# Altium PCB ech.PcbDoc
Units mm, origin at the board's own origin, x right, y up, seen from the top; angles counter-clockwise.
Board outline 49.28 x 80.26 mm, 2 copper layers (Top Layer, Bottom Layer); 61 components, 46 nets, 155 pads, 8 vias.
Unrouted connection lines stored in the file: 1.
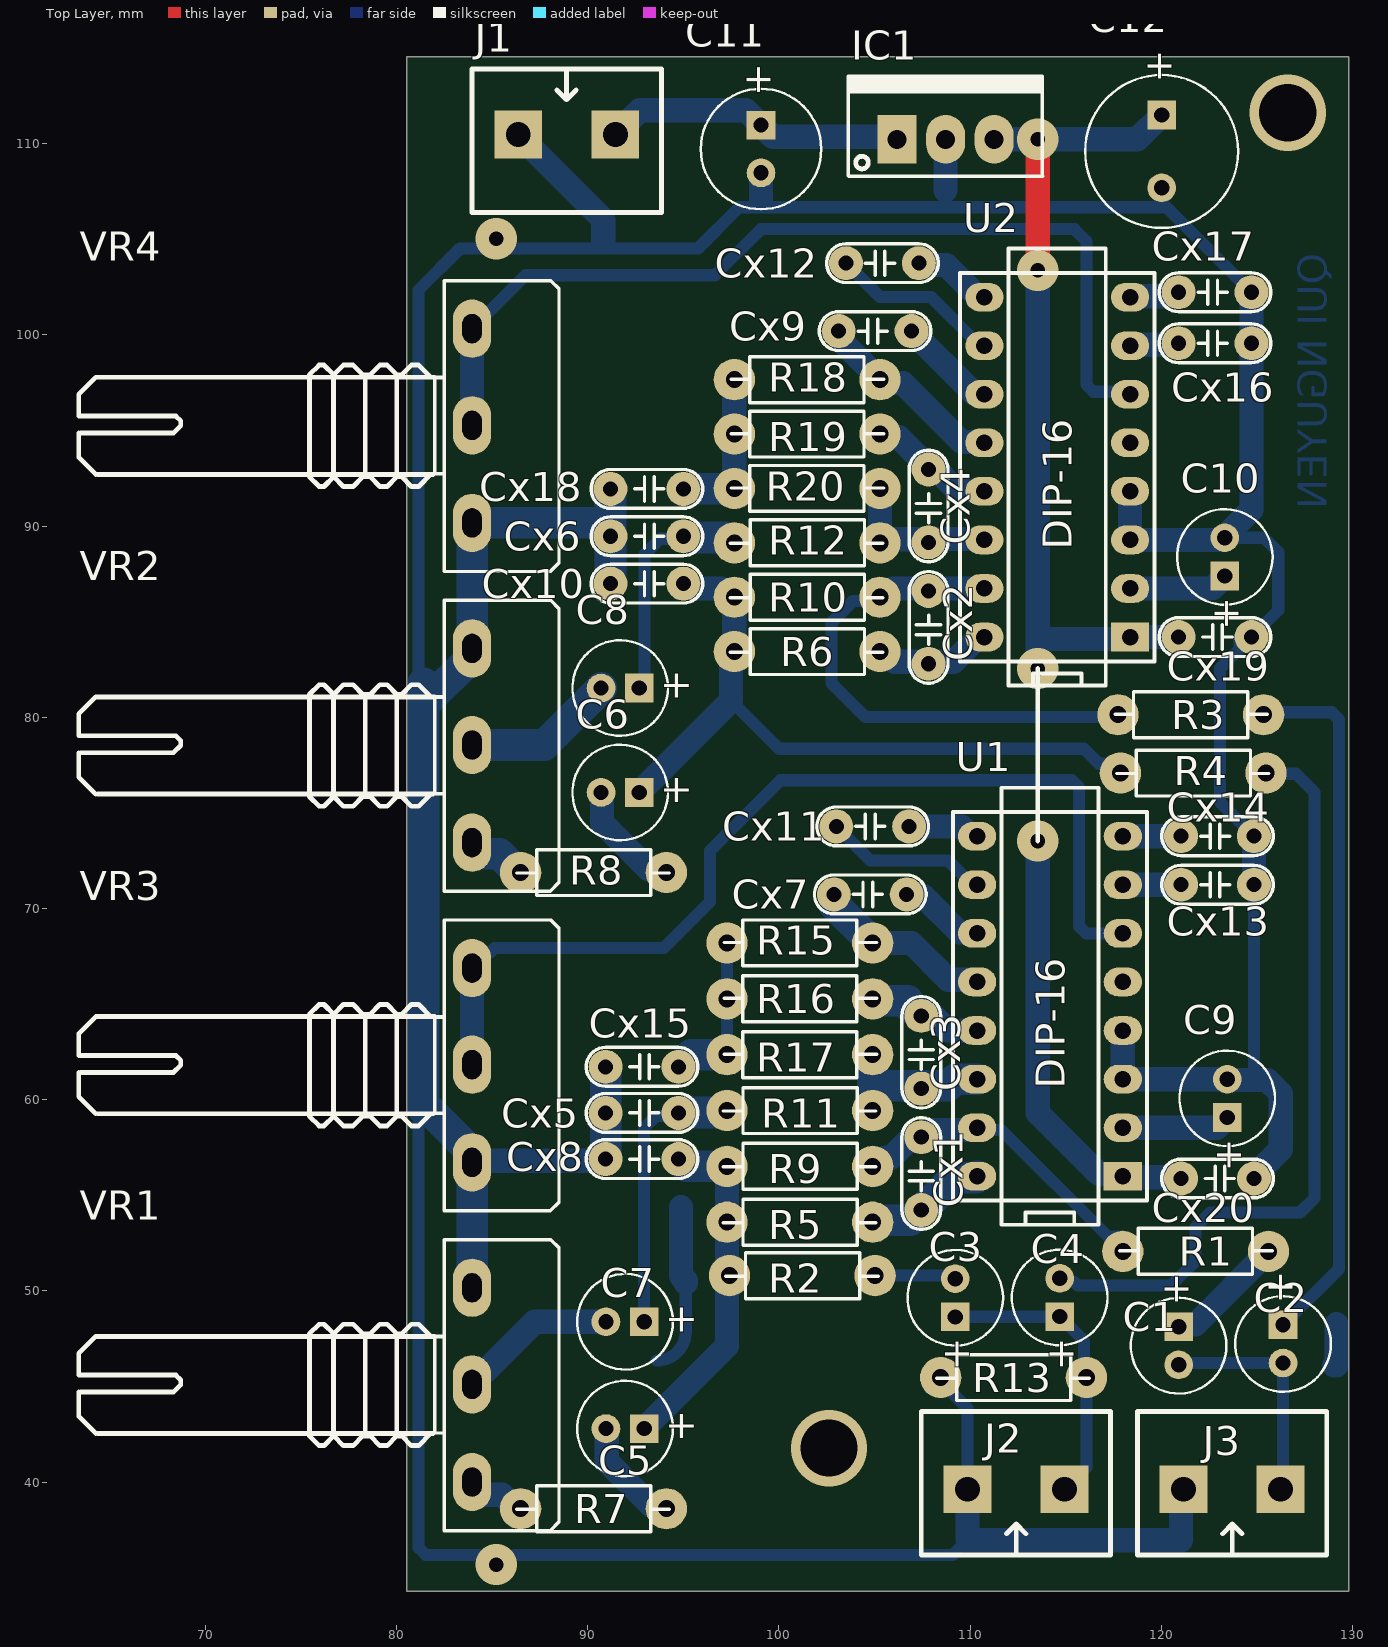
[diagram p0: Top Layer view]
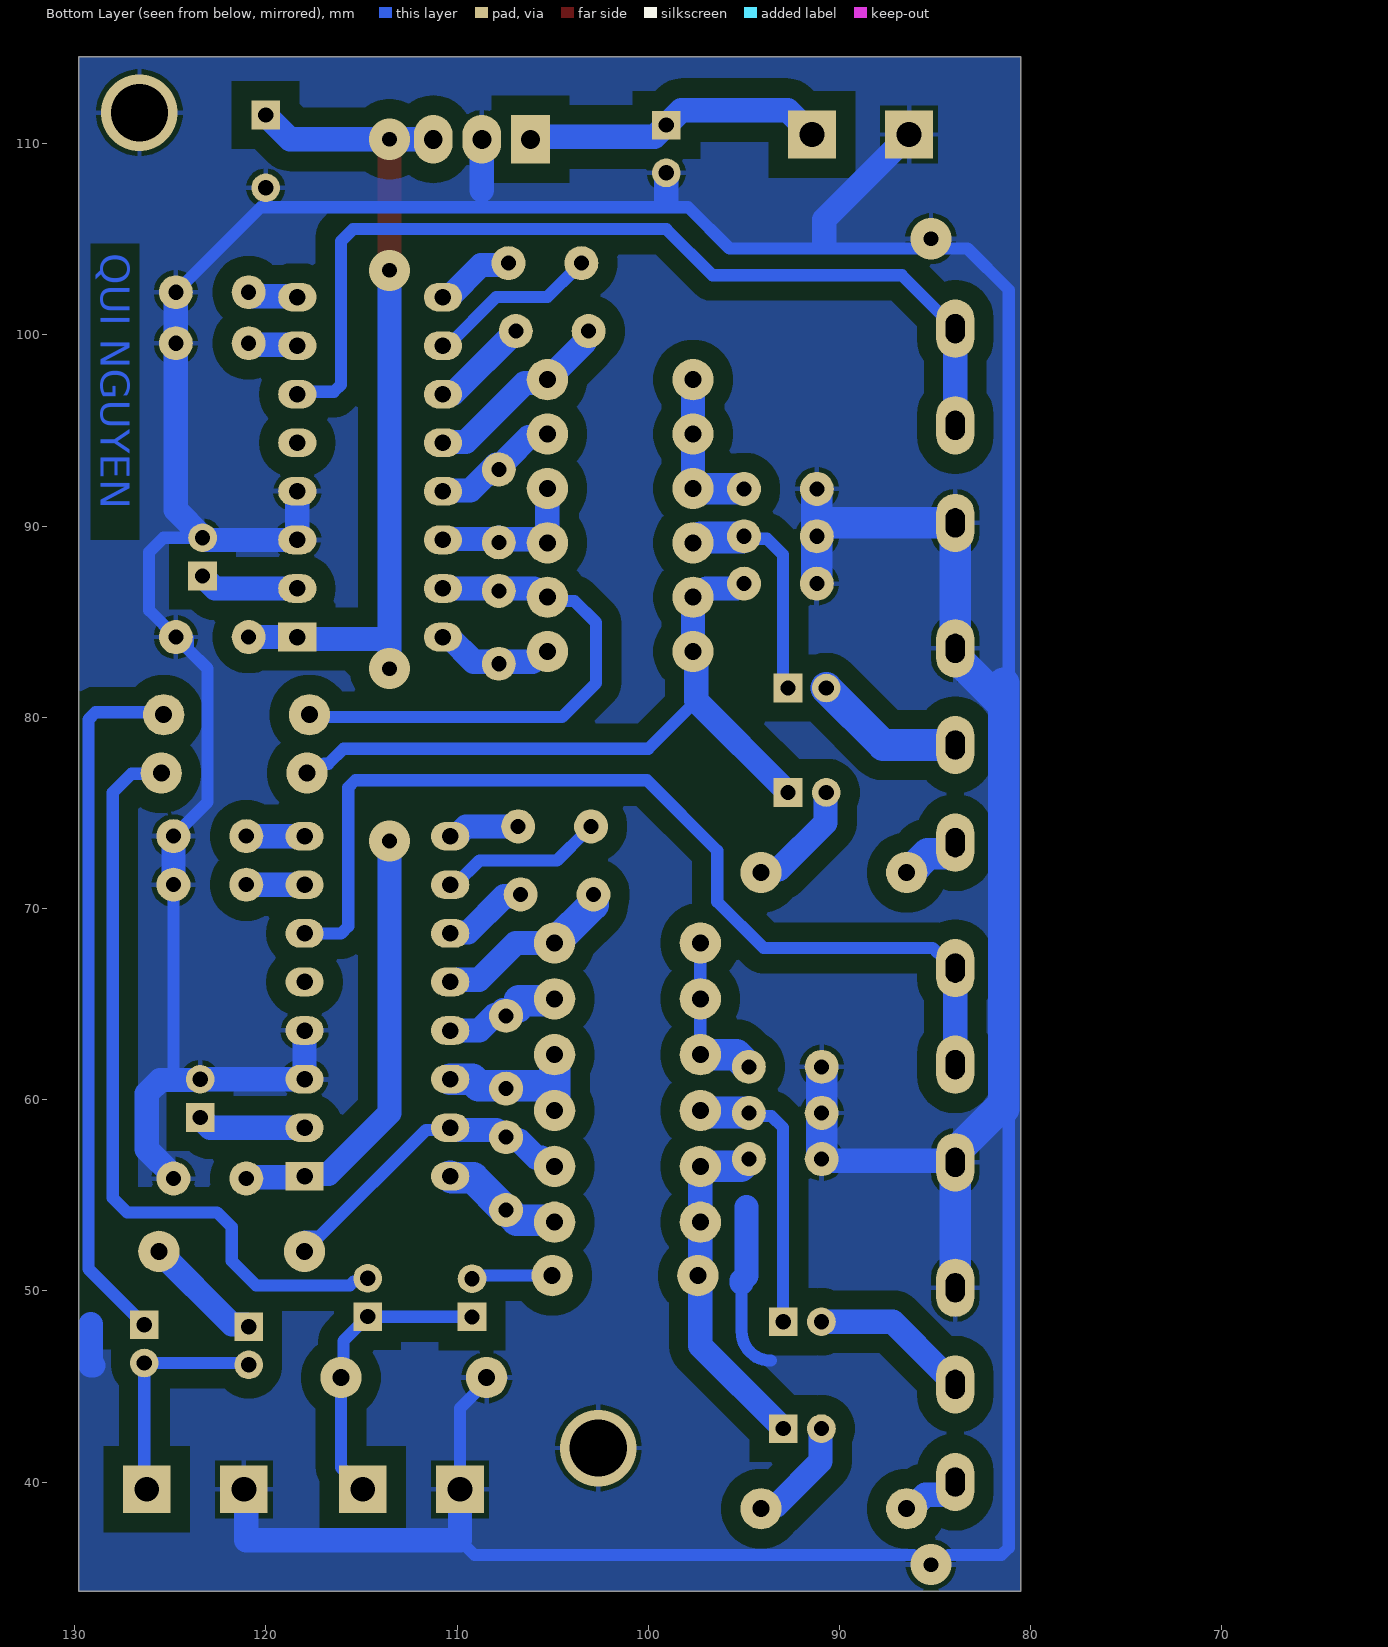
[diagram p1: Bottom Layer view, seen from below]
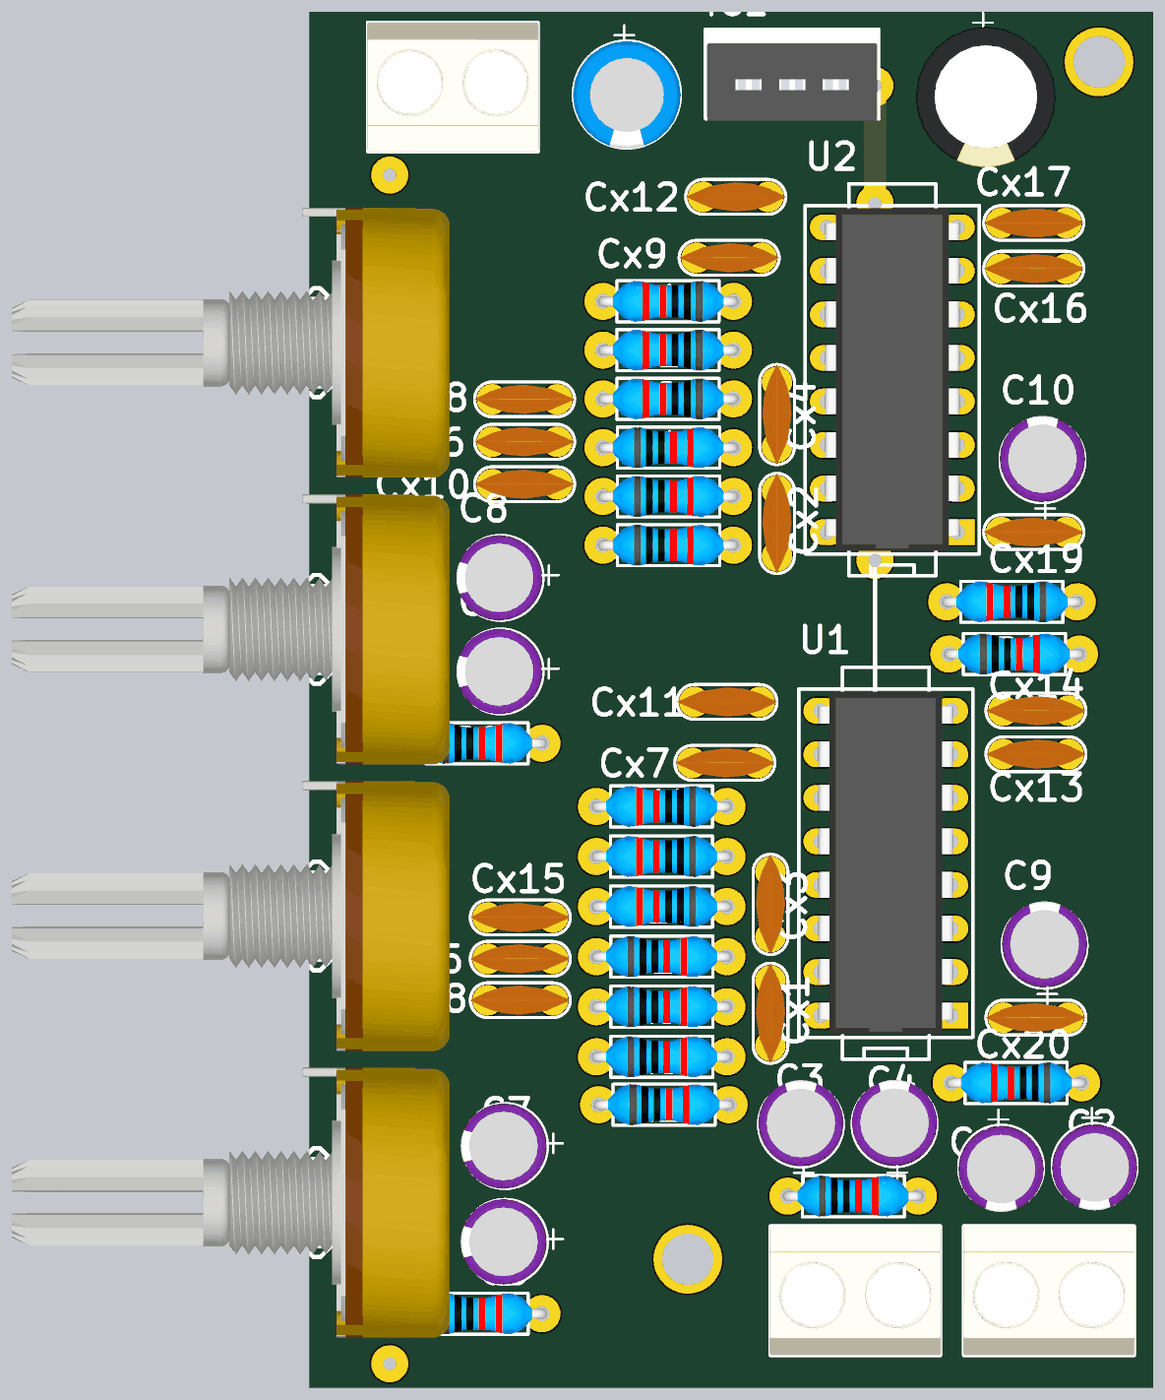
[diagram p2: 3D render of the assembled board from above, using the file's embedded part models]

## Layer stack, top to bottom
Top Solder: solder mask 0.0102, Solder Resist, Dk 3.5
Top Layer: signal copper 0.0356
Dielectric 1: dielectric 0.32, FR-4, Dk 4.8
Bottom Layer: signal copper 0.0356
Bottom Solder: solder mask 0.0102, Solder Resist, Dk 3.5

## Board outline
80.518,34.29 80.518,114.554 129.794,114.554 129.794,34.29

## Design rules (kind name [scope] priority, off if disabled: settings)
Clearance [All] p1: gap=0.254 ignorepadtopadclearanceinfootprint=FALSE except(0: Arc-Hole Track-Hole SMDPad-Hole THPad-Hole Via-Hole Fill-Hole Poly-Hole Region-Hole Text-Hole; 1.016: Arc-Fill Arc-Poly Arc-Region Track-Fill Track-Poly Track-Region SMDPad-Fill SMDPad-Poly SMDPad-Region THPad-Fill THPad-Poly THPad-Region Via-Fill Via-Poly Via-Region Fill-Fill Fill-Poly Fill-Region Poly-Poly Poly-Region Region-Region)
PolygonConnect [All] p1: connectstyle=Relief reliefconductorwidth=0.254 reliefentries=4 polygonreliefangle="90 Angle" airgapwidth=0.254
RoutingVias [All] p1: holewidth=0.711 width=1.27 viastyle="Through Hole" minholewidth=0.711 minwidth=1.27 maxholewidth=0.711 maxwidth=1.27
SolderMaskExpansion [All] p1: expansion=0.102 istentingtop=FALSE
Width [All] p1: maxlimit=1.651 minlimit=0.635 preferedwidth=1.27
30 further rules are at their usual default settings.

## Components (designator, comment, footprint, x,y, rotation, side; value= is the part's Value field where it differs from the comment)
C1 "CN-ALU-DIP" CA-ALU-5 120.904,47.133 r270 top value=104
C2 "CN-ALU-DIP" CA-ALU-5 126.365,47.228 r270 top value=104
C3 "CN-ALU-DIP" CA-ALU-5 109.22,49.641 r90 top value=104
C4 "CN-ALU-DIP" CA-ALU-5 114.681,49.657 r90 top value=104
C5 "CN-ALU-DIP" CA-ALU-5 91.948,42.799 r180 top value=104
C6 "CN-ALU-DIP" CA-ALU-5 91.694,76.073 r180 top value=104
C7 "CN-ALU-DIP" CA-ALU-5 91.948,48.387 r180 top value=104
C8 "CN-ALU-DIP" CA-ALU-5 91.694,81.534 r180 top value=104
C9 "CN-ALU-DIP" CA-ALU-5 123.444,60.071 r90 top value=104
C10 "CN-ALU-DIP" CA-ALU-5 123.317,88.392 r90 top value=104
C11 "CN-ALU-DIP" CA-ALU-6.3 99.06,109.728 r270 top value=104
C12 "CN-ALU-DIP" CA-ALU-8 120.015,109.601 r270 top value=104
Cx1 "XXpF" CN1.5 107.442,56.007 r90 top value=33pF
Cx2 "XXpF" CN1.5 107.823,84.582 r90 top value=33pF
Cx3 "XXpF" CN1.5 107.442,62.357 r90 top value=33pF
Cx4 "XXpF" CN1.5 107.823,90.932 r90 top value=33pF
Cx5 "XXpF" CN1.5 92.964,59.309 r180 top value=33pF
Cx6 "XXpF" CN1.5 93.218,89.471 r180 top value=33pF
Cx7 "XXpF" CN1.5 104.648,70.739 r0 top value=33pF
Cx8 "XXpF" CN1.5 92.964,56.896 r180 top value=33pF
Cx9 "XXpF" CN1.5 104.902,100.203 r0 top value=33pF
Cx10 "XXpF" CN1.5 93.218,86.995 r180 top value=33pF
Cx11 "XXpF" CN1.5 104.775,74.295 r0 top value=33pF
Cx12 "XXpF" CN1.5 105.283,103.759 r0 top value=33pF
Cx13 "XXpF" CN1.5 122.809,71.247 r0 top value=33pF
Cx14 "XXpF" CN1.5 122.809,73.787 r0 top value=33pF
Cx15 "XXpF" CN1.5 92.964,61.722 r180 top value=33pF
Cx16 "XXpF" CN1.5 122.682,99.568 r0 top value=33pF
Cx17 "XXpF" CN1.5 122.682,102.235 r0 top value=33pF
Cx18 "XXpF" CN1.5 93.218,91.948 r180 top value=33pF
Cx19 "XXpF" CN1.5 122.936,84.201 r180 top value=33pF
Cx20 "XXpF" CN1.5 123.063,55.88 r180 top value=33pF
IC1 "LM78xx" TO220-123 106.172,110.236 r0 top
J1 "KF2" KF2-5.08 88.9,110.49 r0 top
J2 "KF2" KF2-5.08 112.395,39.624 r180 top
J3 "KF2" KF2-5.08 123.698,39.624 r180 top
R1 "Res" RES-1/4W-SMALL 122.047,52.07 r180 top
R2 "Res" RES-1/4W-SMALL 100.965,50.8 r0 top
R3 "Res" RES-1/4W-SMALL 121.793,80.137 r180 top
R4 "Res" RES-1/4W-SMALL 121.412,77.089 r0 top
R5 "Res" RES-1/4W-SMALL 100.838,53.594 r0 top
R6 "Res" RES-1/4W-SMALL 101.219,83.439 r0 top
R7 "Res" RES-1/4W-SMALL 90.043,38.608 r0 top
R8 "Res" RES-1/4W-SMALL 90.043,71.882 r0 top
R9 "Res" RES-1/4W-SMALL 100.838,56.515 r0 top
R10 "Res" RES-1/4W-SMALL 101.219,86.284 r0 top
R11 "Res" RES-1/4W-SMALL 100.838,59.436 r0 top
R12 "Res" RES-1/4W-SMALL 101.219,89.128 r0 top
R13 "Res" RES-1/4W-SMALL 112.014,45.466 r0 top
R15 "Res" RES-1/4W-SMALL 101.346,68.199 r180 top
R16 "Res" RES-1/4W-SMALL 101.346,65.278 r180 top
R17 "Res" RES-1/4W-SMALL 101.346,62.357 r180 top
R18 "Res" RES-1/4W-SMALL 101.727,97.663 r180 top
R19 "Res" RES-1/4W-SMALL 101.727,94.818 r180 top
R20 "Res" RES-1/4W-SMALL 101.727,91.974 r180 top
U1 "PT2399" DIP16 114.171,64.897 r90 top
U2 "PT2399" DIP16 114.552,93.098 r90 top
VR1 "REPEAT" VR-S1 83.947,45.085 r270 top value="Volume 50k"
VR2 "REPEAT" VR-S1 83.947,78.528 r270 top value="Volume 50k"
VR3 "DELAY" VR-S1 83.947,61.807 r270 top value="Volume 50k"
VR4 "DELAY" VR-S1 83.947,95.25 r270 top value="Volume 50k"

## Footprints (in the part's own frame and the unit in brackets; to place one, negate y for a bottom-side part, rotate by r counter-clockwise, add the part's x,y. Pads: shape width x height; smd on the part's side, far side on the other; paste and mask are expansions set on the pad)
CA-ALU-5 [mm] "Polarized capacitors, Aluminum Electrolytic Capacitors, 2-Leads, Body 5x11x2x0.5"
  rect 1.5x1.5 hole 0.8: 1(-1,0)
  round 1.5 hole 0.8: 2(1,0)
  silkscreen extent -2.5,-2.5 2.5,2.5, body extent -2.41,-2.5 2.59,2.5, height 11
CA-ALU-6.3 [mm] "Polarized capacitors, Aluminum Electrolytic Capacitors, 2-Leads, Body 6.3x15x2.5x0.5"
  rect 1.5x1.5 hole 0.8: 1(-1.25,0)
  round 1.5 hole 0.8: 2(1.25,0)
  silkscreen extent -3.15,-3.15 3.15,3.15, body extent -3.12,-3.15 3.18,3.15, height 11
CA-ALU-8 [mm] "Polarized capacitors, Aluminum Electrolytic Capacitors, 2-Leads, Body 8x16x3.5x0.5"
  rect 1.5x1.5 hole 0.8: 1(-1.905,0)
  round 1.5 hole 0.8: 2(1.905,0)
  silkscreen extent -4,-4 4,4, body extent -4.1,-4.1 4.1,4.1, height 14.4
CN1.5 [mil]
  round 70 hole 31: 1(-70,0) 2(80,0)
  silkscreen extent -110,-40 120,40, body extent -110,-33 120,33, height 235
DIP16 [mm]
  rect 1.5x2 hole 0.864: 1(-8.897,-3.812)
  oval 1.5x2 hole 0.864: 2(-6.357,-3.812) 3(-3.817,-3.812) 4(-1.277,-3.812) 5(1.263,-3.812) 6(3.803,-3.812) 7(6.343,-3.812) 8(8.883,-3.812) 9(8.883,3.808) 10(6.343,3.808) 11(3.803,3.808) 12(1.263,3.808) 13(-1.277,3.808) 14(-3.817,3.808) 15(-6.357,3.808) 16(-8.897,3.808)
  silkscreen extent -11.44,-5.08 11.42,5.08, body extent -10,-3.93 10,3.94, height 1.99
KF2-5.08 [mm]
  rect 2.5x2.5 hole 1.3: 1(-2.54,0) 2(2.54,0)
  silkscreen extent -4.95,-4.08 4.95,3.43, body extent -5,-4.07 5,3.43, height 10
RES-1/4W-SMALL [mil]
  round 85 hole 35: 1(-140,0) 2(160,0)
  silkscreen extent -148,-47 166,47, body extent -152,-47 172,47, height 97
TO220-123 [mil] "TO-220 - 1-2-3"
  rect 80x100 hole 39: 1(0,0)
  oval 80x100 hole 39: 2(100,0) 3(200,0)
  silkscreen extent -100,-76 300,130, body extent -95,-80 295,97, height 323
VR-S1 [mil]
  oval 120x78.74 hole 40 slot 60 at 0 deg: 1(-200,0) 2(-1,0) 3(200,0)
  silkscreen extent -299,-810 300,179, body extent -310,-818 310,188, height 839

## Part data
C1 C2 C3 C4 C5 C6 C7 C8 C9 C10 C11 C12: "Capacitor (Semiconductor SIM Model)", LatestRevisionDate=17-Jul-2002, LatestRevisionNote="Re-released for DXP Platform.", PackageReference=C1206, Publisher="Altium Limited"
Cx1 Cx2 Cx3 Cx4 Cx5 Cx6 Cx7 Cx8 Cx9 Cx10 Cx11 Cx12 Cx13 Cx14 Cx15 Cx16 Cx17 Cx18 Cx19 Cx20: library part CN
IC1: "Positive Voltage Regulator", ComponentLink1Description="Manufacturer Link", ComponentLink1URL=http://www.st.com/, ComponentLink2Description=Datasheet, ComponentLink2URL=http://www.st.com/stonline/products/literature/ds/2146/l78m05c.pdf, DatasheetVersion=Apr-1994, LatestRevisionDate=17-Jul-2002, LatestRevisionNote="Re-released for DXP Platform.", Note="Tab is connected to pin 3 (GND).", PackageDescription="TO, Thru-Hole, Vertical, Heatsink Mounted; 3 In-Line Leads; Pitch 2.54 mm; Pin sequence 1, 3, 2", PackageReference=ISOWATT220AB, PackageVersion=Jul-1998, Published=24-Aug-2001, Publisher="Altium Limited"
J1 J2 J3: Manufacturer="Würth Elektronik eiSos GmbH", partNo=691103110002, ComponentLink1 Description=Manufacturer, ComponentLink1URL=http://www.we-online.com, ComponentLink2 Description=Datasheet, ComponentLink2URL=http://katalog.we-online.de/em/datasheet/6911031100xx.pdf, Created by="Karrer Zheng", Created Date="29 October 2013", NoPins=2
R1 R2 R3 R4 R5 R6 R7 R8 R9 R10 R11 R12 R13 R15 R16 R17 R18 R19 R20: Manufacturer="Generic Components", Class=Passive, Published=08/06/2000, Publisher="Altium Hobart Technology Centre", SubClass=R
U1 U2: "Reverb"
VR1 VR2 VR3 VR4: library part VR-S, "Var Resistor"

## Via types
v1: diameter 2.159, hole 0.762, Top Layer to Bottom Layer, 6 vias
v2: diameter 4, hole 3, Top Layer to Bottom Layer, 2 vias

## Nets (pads, with @x,y where several pads share a name; then routed paths per layer and width w, separated by ;. In a path a pad name is that pad's centre, name@x,y a point inside that pad or via, vN(x,y) a via of type N, cw(c..) or ccw(c..) an arc to the next point about the centre after c; other vN are vias at no path point)
+5: C12.1 Cx19.2 Cx20.2 IC1.3 U1.1 U2.1 | length 67.8
  Top Layer w1.27: v1(113.538,103.378) v1(113.538,110.236)
  Bottom Layer w1.27: IC1.3 118.745,110.236 C12.1 ; v1(113.538,73.533) 113.538,59.309 116.732,56.115 118.083,56.115 118.258,55.94 120.971,55.94 Cx20.2 ; v1(113.538,82.55) 113.538,84.103 ; v1(113.538,103.378) 113.538,84.103 ; U2.1@118.114,84.201 Cx19.2 ; U2.1 118.266,84.103 113.538,84.103
+12: C11.1 IC1.1 J1.2 | length 15.9
  Bottom Layer w1.27: J1.2 92.71,111.76 98.278,111.76 99.675,110.363 105.791,110.363 105.918,110.236 IC1.1
GND: C9.2 C10.2 C11.2 C12.2 Cx5.2 Cx6.2 Cx8.2 Cx10.2 Cx13.2 Cx14.2 Cx15.2 Cx16.2 Cx17.2 Cx18.2 Cx19.1 Cx20.1 IC1.2 J1.1 J2.2 J3.2 R13.1 U1.3 U1.4 U2.3 U2.4 VR1.1 VR2.1 VR3.3 VR4.3 | length 305.3
  Bottom Layer w0.635: 81.661,59.537 81.153,59.537 81.153,36.567 81.525,36.195 84.297,36.195 84.513,35.979 85.001,35.979 85.217,36.195 85.433,35.979 85.921,35.979 86.137,36.195 109.102,36.195 109.855,36.948 109.855,36.957 ; 81.661,81.534 81.153,82.042 81.153,102.362 83.312,104.521 95.758,104.521 97.917,106.68 108.712,106.68 ; 93.599,46.355 ccw(c93.599,47.879) 95.123,47.879 95.123,50.419 ; R13.1@108.458,45.259 109.855,43.862 J2.2 ; R13.1@108.458,46.021 R13.1@108.458,46.101 ; 108.712,107.569 108.712,106.68 ; C10.2 125.365,89.392 126.111,88.646 126.111,85.598 Cx19.1 124.079,83.566 ; Cx19.1@124.079,84.134 124.079,83.566 ; 124.513,61.027 124.841,61.355 Cx13.2 ; Cx17.2 120.269,106.68 108.712,106.68 ; Cx14.2 123.063,75.565 123.063,82.55 124.079,83.566
  Bottom Layer w1.27: VR3.3 84.032,56.811 90.847,56.811 Cx8.2 ; J1.1 90.805,106.045 90.805,104.902 ; 94.869,54.386 94.869,50.8 95.123,50.546 95.123,50.419 ; 99.06,107.061 C11.2 ; 108.712,107.569 IC1.2 ; J2.2 109.855,36.957 121.031,36.957 121.031,39.624 J3.2 ; U1.4 U1.3 117.987,61.075 123.44,61.075 C9.2 123.488,61.027 124.513,61.027 125.538,61.027 126.238,60.327 126.238,57.414 124.841,56.017 Cx20.1 ; U2.4 U2.3 123.144,89.281 123.255,89.392 C10.2 123.317,89.454 124.714,90.851 Cx16.2 Cx17.2 ; Cx13.2 Cx14.2 ; 129.032,46.101 129.159,46.101 129.159,48.26
  Bottom Layer w1.651: 81.407,59.537 81.407,81.788 ; 81.661,59.537 83.833,57.365 83.833,56.841 VR3.3 VR1.1 ; 81.661,80.893 83.947,83.179 VR2.1 VR4.3 Cx6.2@91.186,90.17 ; Cx5.2@90.908,59.333 Cx5.2 ; Cx8.2 Cx5.2 ; Cx15.2 Cx5.2 ; Cx10.2 Cx6.2 Cx6.2@91.186,90.17 ; Cx18.2 Cx6.2@91.186,90.17
  other v1: 85.217,35.687 85.217,105.029
  other v2: 102.616,41.783 126.619,111.633
INPUT: C3.1 C4.1 J2.1 R13.2 | length 15.6
  Bottom Layer w0.635: C3.1 109.228,48.649 114.673,48.649 C4.1 115.951,47.387 115.951,45.466 116.078,45.339 116.078,40.767 J2.1
NetC1_1: C1.1 R1.1 | length 6.3
  Bottom Layer w1.27: C1.1 121.019,48.248 121.781,48.248 R1.1
NetC2_1: C2.1 R3.1 | length 37
  Bottom Layer w0.635: R3.1 125.476,80.264 128.914,80.264 129.286,79.892 129.286,51.149 126.798,48.661 C2.1
NetC3_2: C3.2 R2.2 | length 4.3
  Bottom Layer w0.635: R2.2 109.061,50.8 C3.2
NetC4_2: C4.2 R4.2 | length 40.6
  Bottom Layer w0.635: C4.2 114.847,50.491 115.413,50.491 115.612,50.292 120.523,50.292 121.793,51.562 121.793,53.34 122.555,54.102 127.254,54.102 128.016,54.864 128.016,76.073 127.04,77.049 125.516,77.049 R4.2
NetC5_1: C5.1 Cx8.1 R2.1 R5.1 R9.1 | length 18.2
  Bottom Layer w1.27: C5.1 97.282,47.133 R5.1 R9.1
  Bottom Layer w1.651: Cx8.1 94.776,56.896 95.157,56.515 R9.1
NetC5_2: C5.2 R7.2 | length 5.9
  Bottom Layer w1.27: C5.2 90.992,42.755 90.992,41.088 93.302,38.778 93.937,38.778 R7.2
NetC6_1: C6.1 Cx10.1 R4.1 R6.1 R10.1 | length 37.2
  Bottom Layer w0.635: 97.493,80.872 100.006,78.359 115.951,78.359 116.737,77.573 116.959,77.573 117.444,77.089 R4.1
  Bottom Layer w1.27: C6.1 97.493,80.872 97.493,83.269 R6.1 R10.1 97.422,86.284 96.965,86.741 95.387,86.741 95.133,86.995 Cx10.1
NetC6_2: C6.2 R8.2 | length 6.1
  Bottom Layer w1.27: C6.2 90.738,76.029 90.738,74.489 93.175,72.052 93.937,72.052 R8.2
NetC7_1: C7.1 Cx5.1 R11.1 | length 14.9
  Bottom Layer w0.635: C7.1 92.948,58.531 93.567,59.15 94.583,59.15 Cx5.1
  Bottom Layer w1.651: Cx5.1 94.766,59.333 97.042,59.333 97.145,59.436 R11.1
NetC7_2: C7.2 VR1.2 | length 8.5
  Bottom Layer w1.27: VR1.2 83.947,45.437 84.284,45.774 84.611,45.774 87.224,48.387 C7.2
NetC8_1: C8.1 Cx6.1 R12.1 | length 12.3
  Bottom Layer w0.635: C8.1 92.964,81.804 92.964,88.519 93.789,89.344 94.869,89.344 Cx6.1
  Bottom Layer w1.651: Cx6.1 95.03,89.471 95.094,89.408 97.246,89.408 97.526,89.128 R12.1
NetC8_2: C8.2 VR2.2 | length 8
  Bottom Layer w1.651: VR2.2 87.714,78.554 C8.2
NetC9_1: C9.1 U1.2 | length 5.7
  Bottom Layer w1.27: U1.2 122.913,58.54 C9.1
NetC10_1: C10.1 U2.2 | length 5.2
  Bottom Layer w1.27: U2.2 122.666,86.741 C10.1
NetCx1_1: Cx1.1 R5.2 U1.16 | length 6.5
  Bottom Layer w1.651: R5.2 104.999,53.691 106.87,53.691 107.408,54.229 Cx1.1 107.476,54.229 109.171,55.924 110.288,55.924 U1.16
NetCx1_2: Cx1.2 R1.2 R9.2 U1.15 | length 15.5
  Bottom Layer w0.635: U1.15 110.482,58.421 111.632,58.421 117.221,52.832 R1.2@117.983,52.832
  Bottom Layer w1.27: R9.2 105.143,56.515 105.587,56.959 105.854,56.959 Cx1.2@106.744,57.849 ; Cx1.2 107.579,58.039 107.96,58.42 109.931,58.42 110.051,58.54 U1.15
NetCx2_1: Cx2.1 R6.2 U2.16 | length 6.3
  Bottom Layer w1.27: R6.2 105.524,83.439 106.061,82.901 107.726,82.901 Cx2.1 107.92,82.901 109.132,82.901 110.432,84.201 U2.16
NetCx2_2: Cx2.2 R3.2 R10.2 U2.15 | length 27.7
  Bottom Layer w0.635: R10.2 105.091,86.092 103.872,86.092 102.743,84.963 102.743,81.788 104.521,80.01 117.602,80.01 R3.2
  Bottom Layer w1.27: R10.2 105.524,86.284 105.981,86.741 U2.15
NetCx3_1: Cx3.1 R11.2 R17.1 U1.14 | length 8.7
  Bottom Layer w1.651: R11.2 104.902,61.214 ; R17.1 104.902,61.214 ; U1.14 109.213,61.08 108.863,60.73 107.466,60.73 107.442,60.706 107.418,60.73 105.386,60.73 104.902,61.214
NetCx3_2: Cx3.2 R16.1 U1.13 | length 6.7
  Bottom Layer w1.27: 106.743,65.278 106.743,65.181 106.743,64.682 107.608,64.682 107.608,64.488 107.677,64.419 108.047,64.419 108.846,63.62 U1.13
  Bottom Layer w1.651: R16.1 104.999,65.181 106.743,65.181
NetCx4_1: Cx4.1 R12.2 R20.1 U2.14 | length 8.5
  Bottom Layer w1.27: R20.1 R12.2 105.524,89.128 105.706,89.311 107.726,89.311 107.823,89.408 107.906,89.325 110.7,89.325 U2.14
NetCx4_2: Cx4.2 R19.1 U2.13 | length 6.1
  Bottom Layer w1.27: R19.1 105.453,94.648 106.266,94.648 Cx4.2@107.386,93.528 ; Cx4.2@107.823,93.218 107.96,93.218 109.313,91.865 110.7,91.865 U2.13
NetCx7_1: Cx7.1 R15.1 U1.12 | length 9.7
  Bottom Layer w1.27: R15.1 106.934,68.199 108.858,66.275 109.936,66.275 110.051,66.16 U1.12
  Bottom Layer w1.651: Cx7.1 102.894,70.715 102.894,70.207 R15.1
NetCx7_2: Cx7.2 U1.11 | length 4.5
  Bottom Layer w1.27: Cx7.2 106.777,70.642 107.539,70.642 109.437,68.744 110.319,68.744 U1.11
NetCx9_1: Cx9.1 R18.1 U2.12 | length 9.6
  Bottom Layer w1.27: Cx9.1@103.346,99.6 R18.1 105.453,97.493 106.469,97.493 109.557,94.405 110.7,94.405 U2.12
NetCx9_2: Cx9.2 U2.11 | length 5.2
  Bottom Layer w1.27: Cx9.2 110.192,96.945 110.7,96.945 U2.11
NetCx11_1: Cx11.1 U1.10 | length 8.3
  Bottom Layer w0.635: Cx11.1@103.251,74.041 104.775,72.517 108.836,72.517 110.113,71.24 U1.10
NetCx11_2: Cx11.2 U1.9 | length 3.8
  Bottom Layer w1.27: Cx11.2 109.535,74.295 110.051,73.78 U1.9
NetCx12_1: Cx12.1 U2.10 | length 8.6
  Bottom Layer w0.635: Cx12.1@103.815,103.449 105.283,101.981 107.954,101.981 110.494,99.441 U2.10
NetCx12_2: Cx12.2 U2.9 | length 4.5
  Bottom Layer w1.27: Cx12.2 107.412,103.662 108.751,103.662 110.432,101.981 U2.9 110.669,102.056 U2.9@110.419,102.056
NetCx13_1: Cx13.1 U1.7 | length 2.8
  Bottom Layer w1.27: U1.7 117.987,71.243 120.773,71.243 Cx13.1@120.777,71.247
NetCx14_1: Cx14.1 U1.8 | length 2.7
  Bottom Layer w1.27: U1.8 117.987,73.783 120.646,73.783 Cx14.1@120.65,73.787
NetCx15_1: Cx15.1 R15.2 R16.2 R17.2 | length 8.6
  Bottom Layer w0.635: R17.2 R16.2 R15.2
  Bottom Layer w1.651: Cx15.1 94.776,61.722 95.411,62.357 R17.2
NetCx16_1: Cx16.1 U2.7 | length 2.7
  Bottom Layer w1.27: U2.7 118.408,99.485 120.948,99.485 Cx16.1@121.031,99.568
NetCx17_1: Cx17.1 U2.8 | length 2.8
  Bottom Layer w1.27: U2.8 118.408,102.025 120.684,102.025 120.894,102.235 Cx17.1@121.031,102.235
NetCx18_1: Cx18.1 R18.2 R19.2 R20.2 | length 8.4
  Bottom Layer w1.27: R20.2 R19.2 R18.2
  Bottom Layer w1.651: Cx18.1 95.009,91.961 97.65,91.961 R20.2
NetLED1_1: 
NetR7_1: R7.1 VR1.3 | length 3.3
  Bottom Layer w1.27: VR1.3 83.947,39.679 84.284,39.341 85.513,39.341 86.246,38.608 R7.1
NetR8_1: R8.1 VR2.3 | length 3.4
  Bottom Layer w1.651: VR2.3 83.947,73.019 84.108,72.858 85.374,72.858 86.35,71.882 R8.1
NetU1_6: U1.6 VR3.1 VR3.2 | length 52.4
  Bottom Layer w0.635: VR3.1 83.947,67.041 84.578,67.672 84.855,67.672 85.128,67.945 93.98,67.945 96.393,70.358 96.393,73.025 100.076,76.708 115.325,76.708 115.697,76.336 115.697,69.071 116.069,68.7 U1.6
  Bottom Layer w1.27: VR3.2 VR3.1
NetU2_6: U2.6 VR4.1 VR4.2 | length 49.6
  Bottom Layer w0.635: VR4.1 86.741,103.124 96.647,103.124 99.06,105.537 115.443,105.537 116.078,104.902 116.078,97.4 116.45,97.028 118.237,97.028 U2.6
  Bottom Layer w1.27: VR4.2 VR4.1
OUTPUT: C1.2 C2.2 J3.1 | length 12.3
  Bottom Layer w0.635: C1.2 120.904,46.228 C2.2 126.365,39.624 J3.1
pads on no net: U1.5 U2.5

## Polygon pours and split planes (outlines as drawn)
GND on Bottom Layer "GND_L02_P000" (solid, remove dead copper, pour order 0): 80.518,114.554 80.518,34.29 129.794,34.29 129.794,114.554

## Other copper
Bottom Layer:
  text "QUI NGUYEN" at 128.651,104.267 h1.52 r90

## Silkscreen, mask and mechanical layers (free items; w line width, h text height)
Top Overlay:
  lines w0.254: 113.538,73.533 113.538,82.55

## Text inside footprints (layer, text, board x,y; h text height)
C1: Top Overlay "+" at 120.167,50.958 h1.5 r270
C2: Top Overlay "+" at 125.628,51.053 h1.5 r270
C3: Top Overlay "+" at 109.957,45.816 h1.5 r90
C4: Top Overlay "+" at 115.418,45.832 h1.5 r90
C5: Top Overlay "+" at 95.773,43.536 h1.5 r180
C6: Top Overlay "+" at 95.519,76.81 h1.5 r180
C7: Top Overlay "+" at 95.773,49.124 h1.5 r180
C8: Top Overlay "+" at 95.519,82.271 h1.5 r180
C9: Top Overlay "+" at 124.181,56.246 h1.5 r90
C10: Top Overlay "+" at 124.054,84.567 h1.5 r90
C11: Top Overlay "+" at 98.323,114.203 h1.5 r270
C12: Top Overlay "+" at 119.278,114.926 h1.5 r270
U1: Top Overlay "DIP-16" at 114.935,60.572 h1.5 r90
U2: Top Overlay "DIP-16" at 115.316,88.773 h1.5 r90